# Altium PCB PCB.PcbDoc
Units mm, origin at the board's own origin, x right, y up, seen from the top; angles counter-clockwise.
Board outline 80.77 x 41.91 mm, 4 copper layers (SIG / PWR 1, GND, GND (Mid2), SIG / PWR 2), stack 0.603 mm thick; 49 components, 40 nets, 187 pads, 22 vias.
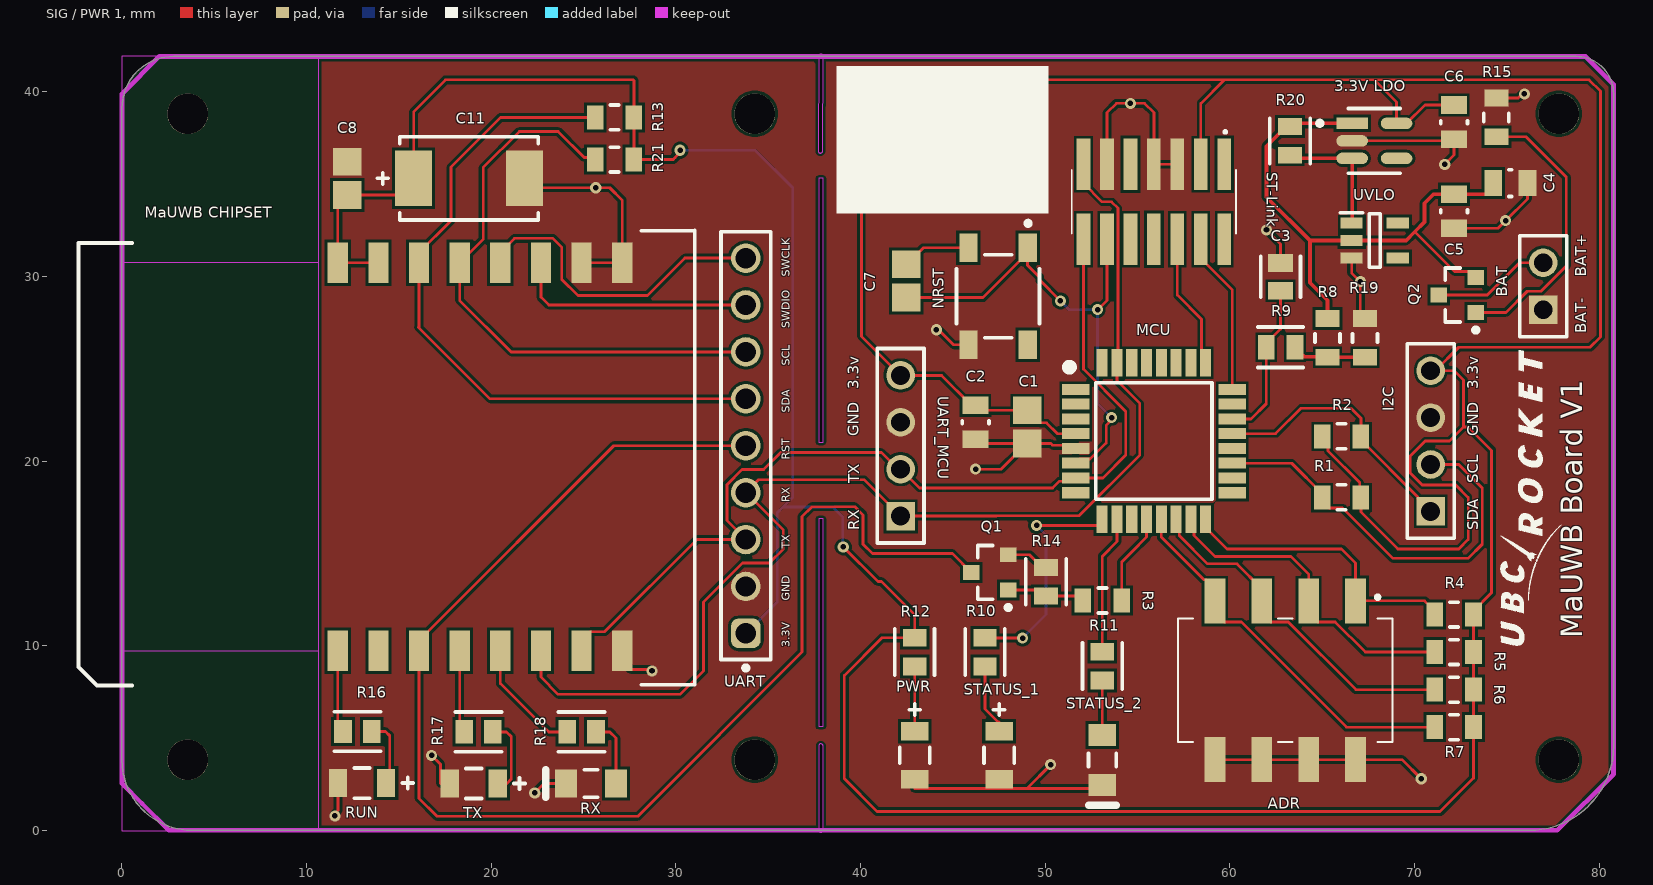
[diagram p0: SIG / PWR 1 view]
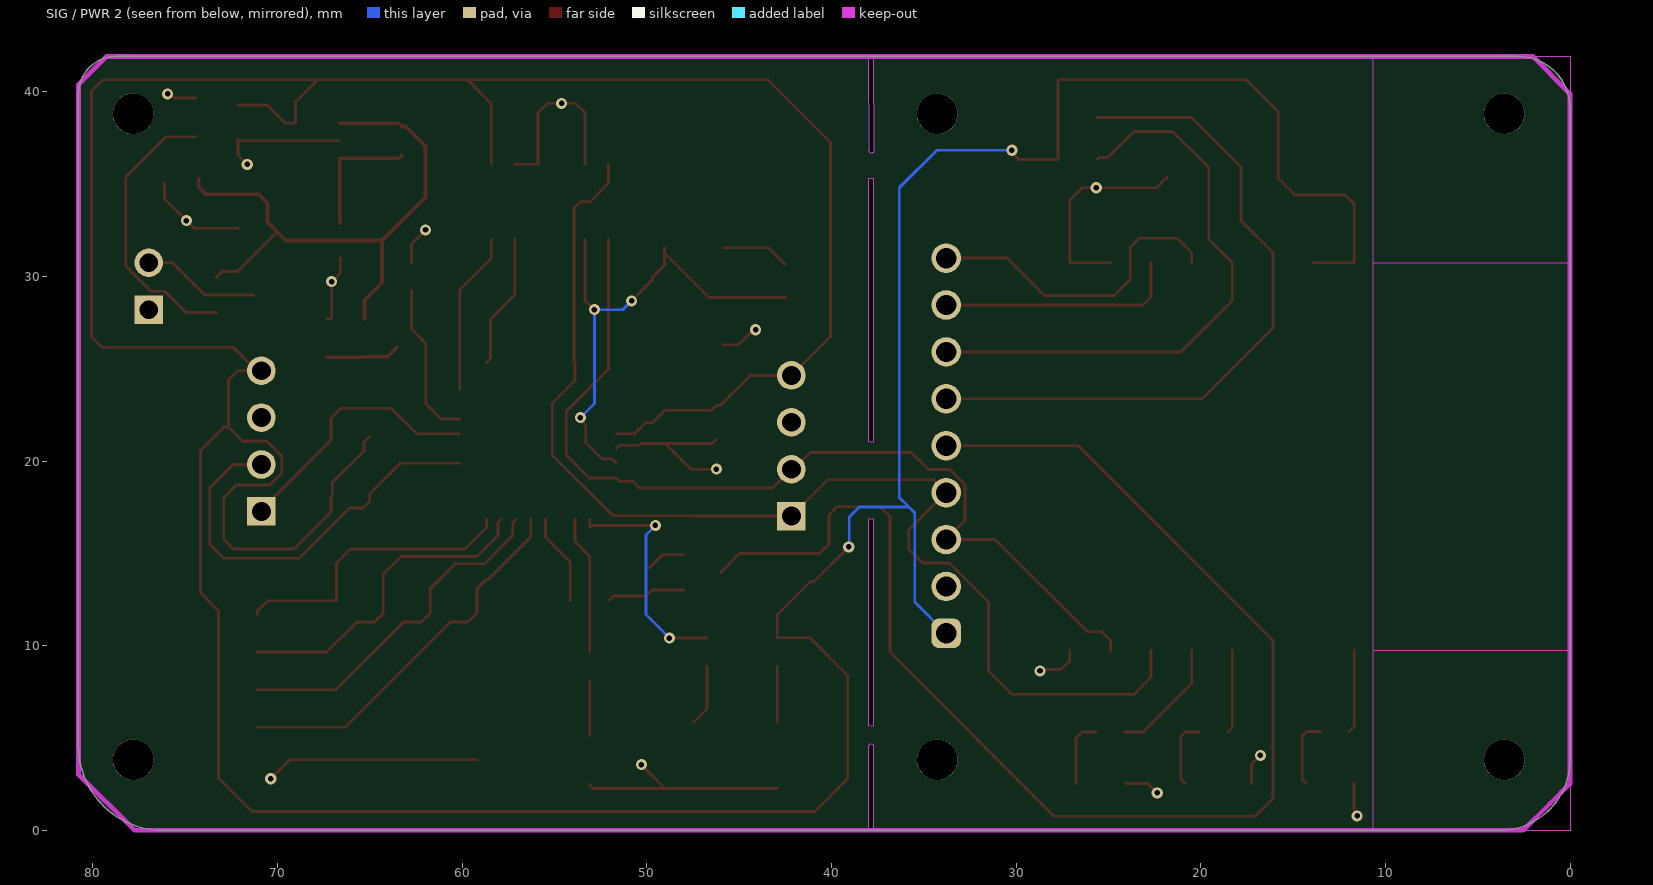
[diagram p1: SIG / PWR 2 view, seen from below]
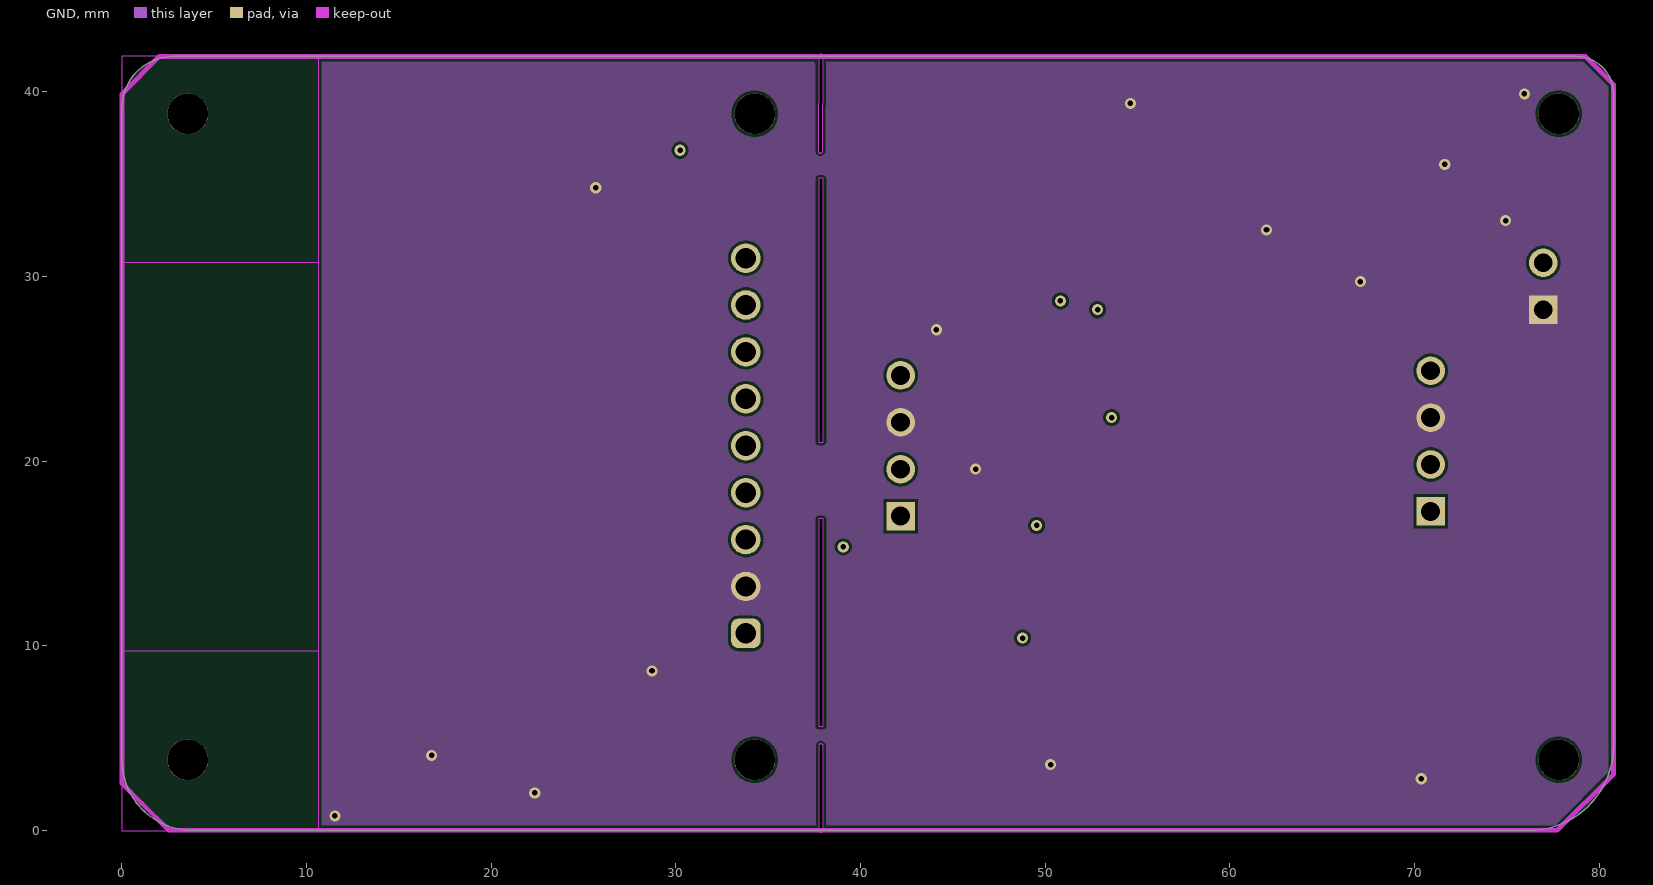
[diagram p2: GND]
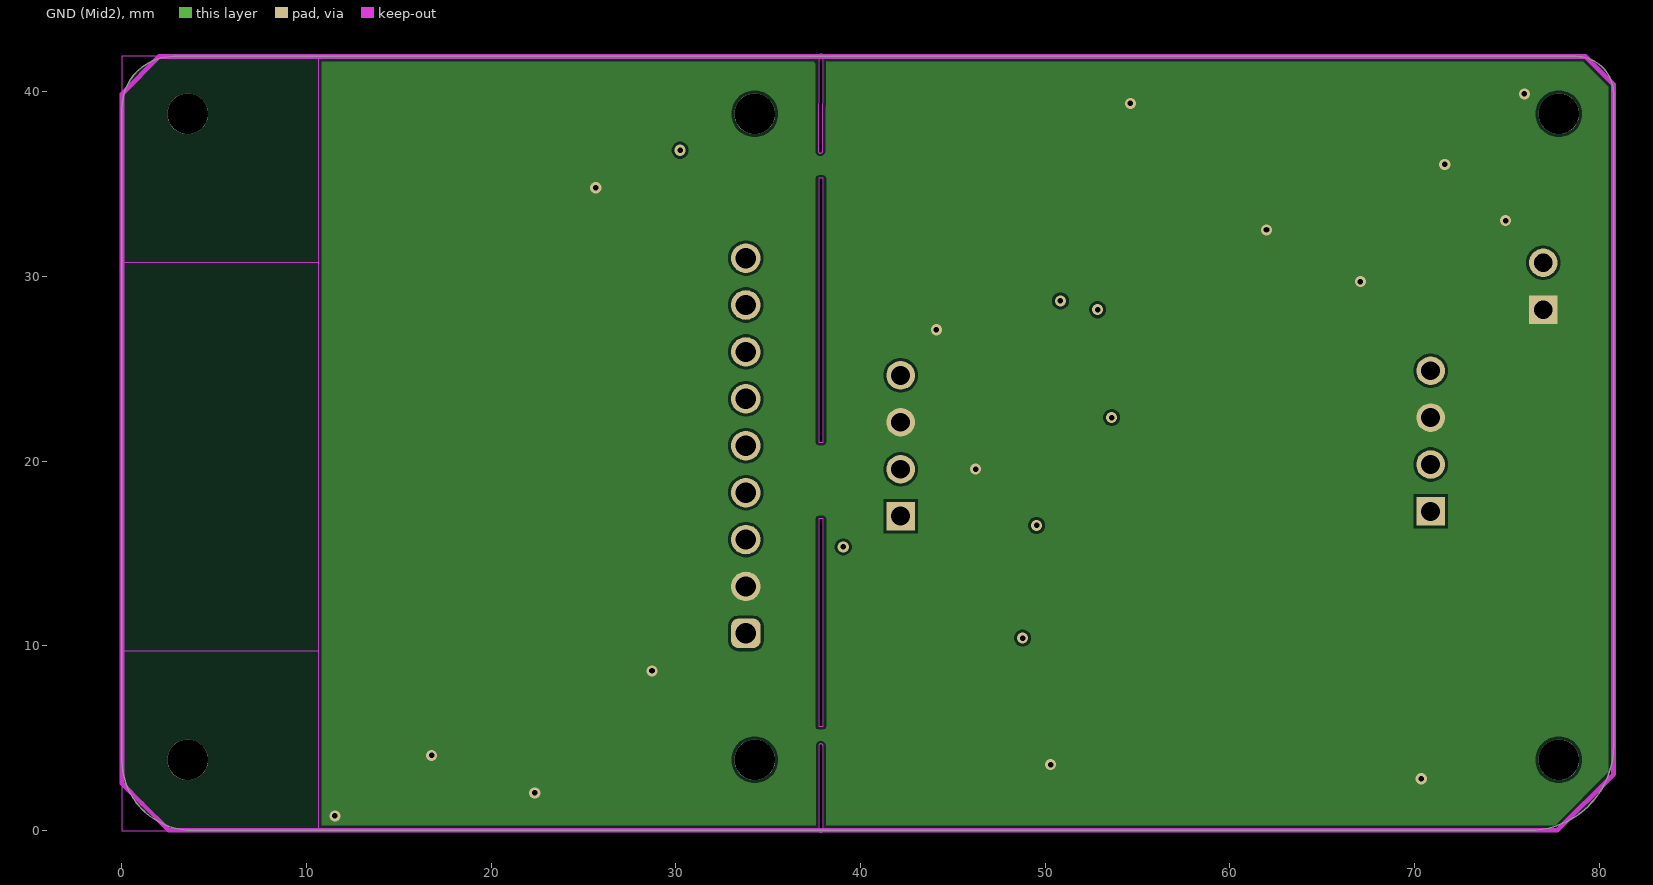
[diagram p3: GND (Mid2)]
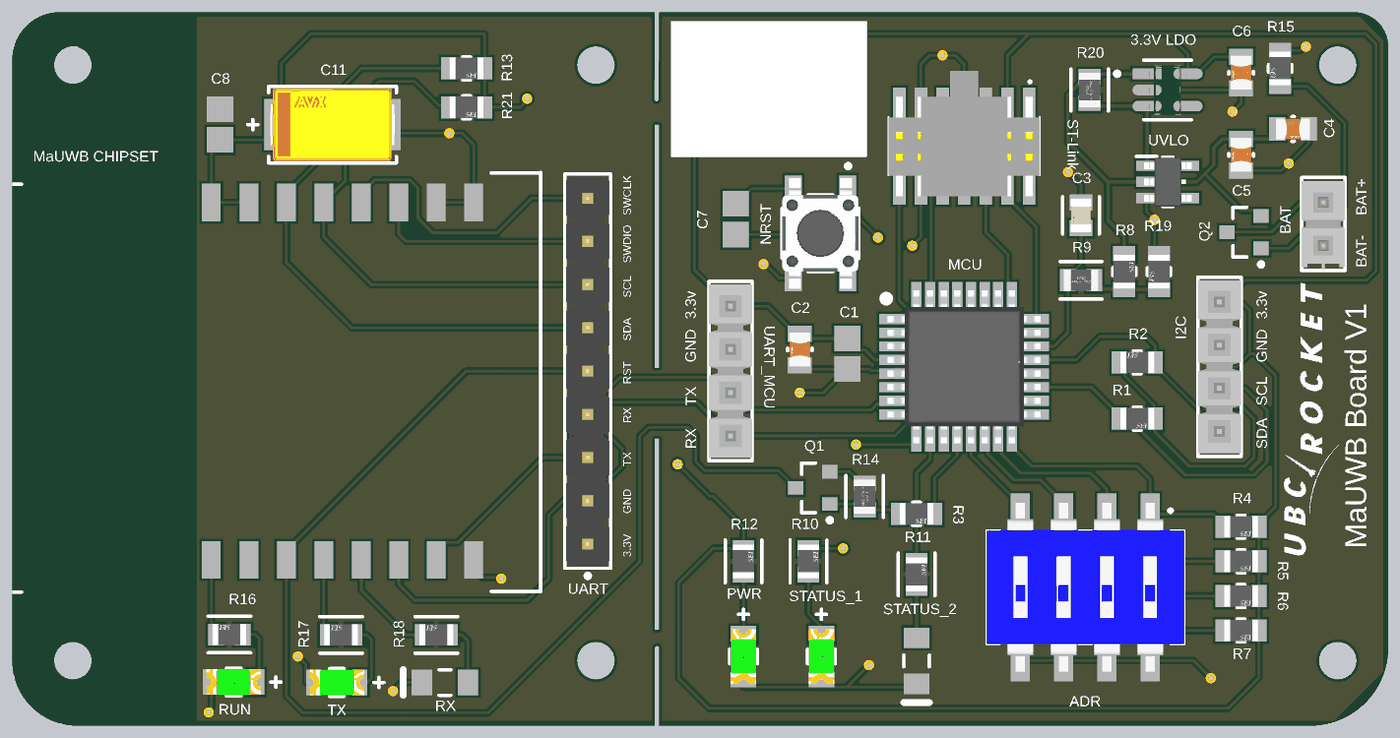
[diagram p4: 3D render of the assembled board from above, using the file's embedded part models]

## Layer stack, top to bottom
Top Solder: solder mask 0.0102, Solder Resist, Dk 3.5
SIG / PWR 1: signal copper 0.0356
Dielectric 2: prepreg 0.0711, PP-006, Dk 4.1
GND: signal copper 0.035
Dielectric 1: dielectric 0.32, FR-4, Dk 4.8
GND (Mid2): signal copper 0.035
Dielectric 3: prepreg 0.0711, PP-006, Dk 4.1
SIG / PWR 2: signal copper 0.0356
Bottom Solder: solder mask 0.0102, Solder Resist, Dk 3.5

## Board outline
3.81,0 76.2,0 ccw(c76.2,4.572) 80.772,4.572 80.772,39.878 ccw(c78.74,39.878) 78.74,41.91 2.794,41.91 ccw(c2.794,39.116) 0,39.116 0,3.81 ccw(c3.81,3.81)
cut-out: 37.693,36.801 ccw(c37.82,36.8) 37.947,36.799 37.973,41.909 37.973,41.91 ccw(c37.846,41.91) 37.719,41.911
cut-out: 37.719,21.02 37.973,21.02 37.973,35.31 37.719,35.31
cut-out: 37.719,0.02 ccw(c37.846,0.02) 37.973,0.02 37.973,4.56 ccw(c37.846,4.56) 37.719,4.56
cut-out: 37.719,5.63 37.973,5.63 37.973,16.87 37.719,16.87

## Design rules (kind name [scope] priority, off if disabled: settings)
Clearance [All] p1: gap=0.15 ignorepadtopadclearanceinfootprint=TRUE
ComponentClearance MCU [InComponent('MCU')] p1: gap=0 collisioncheckmode=3 verticalgap=0 showdistances=FALSE
ComponentClearance ComponentClearance_1 [All] p2: gap=0.254 collisioncheckmode=3 verticalgap=0.254 showdistances=FALSE
MinimumSolderMaskSliver [All] p1: minsoldermaskwidth=0.15
PlaneConnect [All] p1: planeconnectstyle=Direct reliefexpansion=0.508 reliefentries=4 reliefconductorwidth=0.254 reliefairgap=0.254
PolygonConnect [All] p1: connectstyle=Direct reliefconductorwidth=0.254 reliefentries=4 polygonreliefangle="90 Angle" airgapwidth=0.254
RoutingVias [All] p1: holewidth=0.3 width=0.6 viastyle="Through Hole" minholewidth=0.3 minwidth=0.6 maxholewidth=0.4 maxwidth=0.8
SilkToSilkClearance [All] p1: silktosilkclearance=0.15
SilkToSolderMaskClearance [IsPad] p1: minsilkscreentomaskgap=0.15 clearancetoexposedcopper=TRUE
SolderMaskExpansion [All] p1: expansion=0 istentingtop=FALSE
SupplyNets "Schematic Supply Nets" [InNet('GND')] p1: voltage=0.000
SupplyNets "Schematic Supply Nets_1" [InNet('3.3V')] p2: voltage=0.000
Width [All] p1: maxlimit=0.25 minlimit=0.15 preferedwidth=0.2
25 further rules are at their usual default settings.

## Classes and differential pairs
component class U_MCU: ADR C1 C2 C3 C7 I2C MCU NRST R1 R2 R4 R5 R6 R7 R8 R9 R10 R11 R19 ST-Link STATUS_1 STATUS_2 UART_MCU
component class U_MaUWB: C8 C11 "MaUWB CHIPSET" Q1 R3 R13 R14 R16 R17 R18 R21 RUN RX TX UART
component class U_BMS: "3.3V LDO" BAT C4 C5 C6 PWR Q2 R12 R15 R20 UVLO

## Components (designator, comment, footprint, x,y, rotation, side; value= is the part's Value field where it differs from the comment)
"3.3V LDO" "AP2112K-3.3TRG1" FP-SOT25-IPC_A 67.818,37.338 r0 top
ADR "219-4MST" 2194MST 62.992,8.128 r180 top
BAT "TSW-102-26-G-S" SMTC-TSW-102-26-XX-S 76.962,28.194 r90 top
C1 "100nF, 0805, X5R, 10%" CAPC2013X140X50ML20T25 49.022,21.844 r90 top
C2 "1uF, 0805, X7R, 10%" FP-CC0805-0_85-MFG 46.228,22.098 r270 top value="1 uF"
C3 "10pF, 0805, X7R, 5%" FP-C0805C-DN-MFG 62.738,29.972 r90 top value="10 pF"
C4 "1uF, X7R, 0805, 10%" FP-CC0805-0_85-MFG 75.184,35.052 r0 top value="1 uF"
C5 "1uF, X7R, 0805, 10%" FP-CC0805-0_85-MFG 72.136,33.528 r270 top value="1 uF"
C6 "1uF, X7R, 0805, 10%" FP-CC0805-0_85-MFG 72.136,38.354 r270 top value="1 uF"
C7 "100nF, 0805, X5R, 10%" CAPC2013X140X50ML20T25 42.47,29.75 r270 top
C8 "100nF, 0805, X5R, 10%" CAPC2013X140X50ML20T25 12.192,35.306 r270 top
C11 "100uF, Tantalum, 2917, 10V" FP-TAJD-MFG 18.796,35.306 r180 top
I2C "TSW-104-08-G-S" SMTC-TSW-104-08-X-S 70.866,17.272 r90 top
"MaUWB CHIPSET" "MaUWB_DW3000" MaUWB_DW3000 0.088,9.734 r90 top
MCU "STM32C031K4T6" QFP80P900X900X160-32N 55.88,21.082 r0 top
NRST "TACT SW, 50mA" FP-PTS647SK38SMTR2LFS-MFG 47.44,28.92 r270 top
PWR "LED Green, 1206, 20mA" FP-SML-LX1206GC-TR-MFG 42.926,4.064 r270 top
Q1 "NPN, 200mA, SOT-23" ONSC-SOT-23-3-318-08_V 46.99,13.97 r180 top
Q2 "PMOS, 3.7A, SOT-23" ONSC-SOT-23-3-318-08_V 72.31,28.99 r180 top
R1 "" FP-RMCF0805-MFG 66.04,18.034 r0 top
R2 "" FP-RMCF0805-MFG 66.04,21.336 r180 top
R3 "4.7k, 0805, 5%" FP-RMCF0805-MFG 53.086,12.446 r0 top
R4 "" FP-RMCF0805-MFG 72.136,11.684 r0 top
R5 "" FP-RMCF0805-MFG 72.136,9.652 r0 top
R6 "" FP-RMCF0805-MFG 72.136,7.62 r0 top
R7 "4.7k, 0805, 5%" FP-RMCF0805-MFG 72.136,5.588 r0 top
R8 "4.7k, 0805, 5%" FP-RMCF0805-MFG 65.278,26.67 r90 top
R9 "100k, 0805, 1%" FP-CRGCQ0805-IPC_C 62.738,26.162 r0 top value=100KΩ
R10 "470, 0805, 1%" FP-RMCF0805-IPC_C 46.736,9.652 r90 top
R11 "470, 0805, 1%" FP-RMCF0805-IPC_C 53.086,8.89 r90 top
R12 "470, 0805, 1%" FP-RMCF0805-IPC_C 42.926,9.652 r90 top
R13 "" FP-RMCF0805-MFG 26.67,38.608 r0 top
R14 "47k, 0805, 5%" FP-CRGCQ0805-IPC_C 50.038,13.462 r270 top value=47KΩ
R15 "4.7k, 0805, 5%" FP-RMCF0805-MFG 74.422,38.608 r270 top
R16 "" FP-RMCF0805-IPC_C 12.744,5.354 r180 top
R17 "" FP-RMCF0805-IPC_C 19.304,5.334 r180 top
R18 "470, 0805, 1%" FP-RMCF0805-IPC_C 24.892,5.334 r180 top
R19 "4.7k, 0805, 5%" FP-RMCF0805-MFG 67.31,26.67 r270 top
R20 "100k, 0805, 1%" FP-CRGCQ0805-IPC_C 63.246,37.338 r90 top value=100KΩ
R21 "4.7k, 0805, 5%" FP-RMCF0805-MFG 26.67,36.322 r0 top
RUN "LED Green, 1206, 20mA" FP-SML-LX1206GC-TR-MFG 12.998,2.56 r180 top
RX "LED Red, 1206, 30mA" LUMX-SML-LX1206IC_V 25.4,2.54 r180 top
ST-Link "FTSH-107-01-F-DV-K-P-TR" FTSH-107-XX-YYY-DV-K-P-TR 55.88,34.036 r180 top
STATUS_1 "LED Green, 1206, 20mA" FP-SML-LX1206GC-TR-MFG 47.498,4.064 r270 top
STATUS_2 "LED Red, 1206, 30mA" LUMX-SML-LX1206IC_V 53.086,3.81 r270 top
TX "" FP-SML-LX1206GC-TR-MFG 19.05,2.54 r180 top
UART "61300911121" 61300911121 33.782,20.828 r90 top
UART_MCU "TSW-104-08-G-S" SMTC-TSW-104-08-X-S 42.164,17.018 r90 top
UVLO "TLV840NADL35DBVR" SOT95P280X145-5N 67.838,31.938 r0 top

## Footprints (in the part's own frame and the unit in brackets; to place one, negate y for a bottom-side part, rotate by r counter-clockwise, add the part's x,y. Pads: shape width x height; smd on the part's side, far side on the other; paste and mask are expansions set on the pad)
2194MST [mm]
  rect 1.13x2.44 smd: 1(-3.81,-4.3) 2(-1.27,-4.3) 3(1.27,-4.3) 4(3.81,-4.3) 5(3.81,4.3) 6(1.27,4.3) 7(-1.27,4.3) 8(-3.81,4.3)
  silkscreen extent -5.81,-4.6 5.81,3.35, body extent -5.81,-4.95 5.81,4.95, height 4.27
61300911121 [mm] "Pin Header, pitch 2.54 mm, THT, Vertical, single row, 9p"
  rrect50% 1.6x1.6 hole 1.1: 1(-10.16,0)
  round 1.6 hole 1.1: 2(-7.62,0) 3(-5.08,0) 4(-2.54,0) 5(0,0) 6(2.54,0) 7(5.08,0) 8(7.62,0) 9(10.16,0)
  silkscreen extent -12.15,-1.35 11.58,1.35, body extent -11.43,-1.27 11.43,1.27, height 8.57
CAPC2013X140X50ML20T25 [mm] "Chip Capacitor, 2-Leads, Body 2.00x1.25mm, IPC Low Density"
  rect 1.5x1.55 smd: 1(-0.9,0) 2(0.9,0)
  body extent -1.1,-0.72 1.1,0.72, height 1.4
FP-C0805C-DN-MFG [mm]
  rect 0.95x1.35 smd paste+0 mask+0: 1(-0.75,0) 2(0.75,0)
  silkscreen extent -1.1,-1.07 1.1,1.07, body extent -1.4,-0.85 1.4,0.85, height 0.25
FP-CC0805-0_85-MFG [mm]
  rect 0.95x1.4 smd paste+0 mask+0: 1(-0.925,0) 2(0.925,0)
  silkscreen extent -0.08,-0.72 0.08,0.72, body extent -1.6,-1.05 1.6,1.05, height 0.25
FP-CRGCQ0805-IPC_C [mm]
  rect 0.906x1.31 smd paste+0 mask+0: 1(-0.776,0) 2(0.776,0)
  silkscreen extent -1.23,-1.1 1.23,1.1, body extent -1.33,-0.8 1.33,0.8, height 0.25
FP-PTS647SK38SMTR2LFS-MFG [mm]
  rect 1.55x1 smd paste+0 mask+0: 1(-2.625,1.6) 2(2.625,1.6) 3(-2.625,-1.6) 4(2.625,-1.6)
  silkscreen extent -4.07,-2.25 2.25,2.25, body extent -3.5,-2.35 3.5,2.35, height 0.25
FP-RMCF0805-IPC_C [mm]
  rect 0.955x1.262 smd paste+0 mask+0: 1(-0.776,0) 2(0.776,0)
  silkscreen extent -1.25,-1.07 1.25,1.07, body extent -1.35,-0.77 1.35,0.77, height 0.25
FP-RMCF0805-MFG [mm]
  rect 0.9x1.3 smd paste+0 mask+0: 1(-1.05,0) 2(1.05,0)
  silkscreen extent -0.23,-0.67 0.23,0.67, body extent -1.6,-0.77 1.6,0.77, height 0.25
FP-SML-LX1206GC-TR-MFG [mm]
  rect 1x1.5 smd paste+0 mask+0: 1(-1.3,0) 2(1.3,0)
  silkscreen extent -2.78,-0.81 0.43,0.81, body extent -1.9,-0.91 1.9,0.91, height 0.25
FP-SOT25-IPC_A [mm]
  rect 1.707x0.616 smd paste+0 mask+0: 1(-1.201,0.95)
  rrect100% 1.707x0.616 smd paste+0 mask+0: 2(-1.201,0) 3(-1.201,-0.95) 4(1.201,-0.95) 5(1.201,0.95)
  silkscreen extent -3.08,-1.75 1.4,1.75, body extent -2.55,-2 2.55,2, height 0.25
FP-TAJD-MFG [mm]
  rect 2x3 smd paste+0 mask+0: 1(-3,0) 2(3,0)
  silkscreen extent -3.75,-2.25 4.97,2.25, body extent -4.1,-2.35 4.1,2.35, height 0.25
FTSH-107-XX-YYY-DV-K-P-TR [mm]
  rect 0.74x2.79 smd: 1(-3.81,-2.035) 2(-3.81,2.035) 3(-2.54,-2.035) 4(-2.54,2.035) 5(-1.27,-2.035) 6(-1.27,2.035) 7(0,-2.035) 8(0,2.035) 9(1.27,-2.035) 10(1.27,2.035) 11(2.54,-2.035) 12(2.54,2.035) 13(3.81,-2.035) 14(3.81,2.035)
  silkscreen extent -4.44,-3.83 4.44,1.72, body extent -4.44,-4.43 4.45,2.94, height 6.99
LUMX-SML-LX1206IC_V [mm] "SMD, 2-Leads, Body 3.2x1.5mm"
  rect 1.2x1.5 smd: 1(-1.35,0) 2(1.35,0)
  silkscreen extent -0.35,-0.75 2.45,0.75, body extent -1.6,-0.8 1.6,0.8, height 1.1
MaUWB_DW3000 [mm]
  rect 2.2x1.1 smd: 1(0,-11.6) 2(0,-13.8) 3(0,-16) 4(0,-18.2) 5(0,-20.4) 6(0,-22.6) 7(0,-24.8) 8(0,-27) 9(21,-11.6) 10(21,-13.8) 11(21,-16) 12(21,-18.2) 13(21,-20.4) 14(21,-22.6) 15(21,-24.8) 16(21,-27)
  Keep-Out Layer region: 0,-10.58 21,-10.58 21,0 0,0
  silkscreen extent -1.89,-30.93 22.76,2.45
ONSC-SOT-23-3-318-08_V [mm] "SOT23, 3-Leads, Body 2.92x1.3mm, Pitch 0.95mm"
  rect 0.9x0.8 smd: 1(-1,0.95) 2(-1,-0.95) 3(1,0)
  silkscreen extent -1.13,-1.46 0.65,2.02, body extent -0.65,-1.46 0.65,1.46, height 1.11
QFP80P900X900X160-32N [mm]
  rect 1.475x0.6 smd: 1(-4.238,2.8) 2(-4.238,2) 3(-4.238,1.2) 4(-4.238,0.4) 5(-4.238,-0.4) 6(-4.238,-1.2) 7(-4.238,-2) 8(-4.238,-2.8) 17(4.238,-2.8) 18(4.238,-2) 19(4.238,-1.2) 20(4.238,-0.4) 21(4.238,0.4) 22(4.238,1.2) 23(4.238,2) 24(4.238,2.8)
  rect 0.6x1.475 smd: 9(-2.8,-4.238) 10(-2,-4.238) 11(-1.2,-4.238) 12(-0.4,-4.238) 13(0.4,-4.238) 14(1.2,-4.238) 15(2,-4.238) 16(2.8,-4.238) 25(2.8,4.238) 26(2,4.238) 27(1.2,4.238) 28(0.4,4.238) 29(-0.4,4.238) 30(-1.2,4.238) 31(-2,4.238) 32(-2.8,4.238)
  silkscreen extent -4.77,-3.15 3.15,4.2, body extent -4.5,-4.5 4.5,4.5, height 1.6
SMTC-TSW-102-26-XX-S [mm] ".025 SQ Post Terminal Strip Assembly, 1x2 Pins, Vertical, 2.54mm Pitch, Male"
  rect 1.55x1.55 hole 1.02: 1(0,0)
  round 1.55 hole 1.02: 2(2.54,0)
  silkscreen extent -1.46,-1.27 4,1.27, body extent -1.4,-1.27 3.81,1.27, height 8.38
SMTC-TSW-104-08-X-S [mm] ".025 SQ Post Terminal Strip Assembly, 1x4 Pins, Vertical, 2.54mm Pitch, Male"
  rect 1.55x1.55 hole 1.02: 1(0,0)
  round 1.55 hole 1.02: 2(2.54,0) 3(5.08,0) 4(7.62,0)
  silkscreen extent -1.46,-1.27 9.08,1.27, body extent -1.27,-1.27 8.89,1.27, height 8.38
SOT95P280X145-5N [mm]
  rect 1.2x0.6 smd: 1(-1.25,0.95) 2(-1.25,0) 3(-1.25,-0.95) 4(1.25,-0.95) 5(1.25,0.95)
  silkscreen extent -1.85,-1.45 0.3,1.5, body extent -1.4,-1.45 1.4,1.45, height 1.2

## Part data
"3.3V LDO": library part CMP-12756-000035-1, "IC REG LINEAR 3.3V 600MA SOT25", Case/Package=SOT-23-5, Dropout Voltage=250mV, Max Input Voltage=6V, Max Operating Temperature=85°C, Max Output Current=600mA, Min Input Voltage=2.5V, Min Operating Temperature=-40°C, Output Voltage=3.3V, Package Quantity=1, Quiescent Current=55uA, Accuracy=1.5%, Height=1.3mm, Lead Free="Lead Free", Length=3.1mm, Mount="Surface Mount", Number of Outputs=1, Number of Pins=5, Number of Regulators=1, Output Current=600mA, Output Type=Fixed, Packaging="Tape and Reel", Polarity=Positive, Width=1.7mm
ADR: "Switch", Manufacturer_Name=CTS, Mouser Part Number=774-2194MST, Arrow Part Number=219-4MST, Arrow Price/Stock=https://www.arrow.com/en/products/219-4mst/cts, Datasheet Link=https://componentsearchengine.com/Datasheets/1/219-4MST.pdf, Height=4.3mm, Manufacturer_Part_Number=219-4MST, Mouser Price/Stock=https://www.mouser.co.uk/ProductDetail/CTS-Electronic-Components/219-4MST?qs=qNzHFtQhdJ8xGV2Z9mul9A%3D%3D
BAT: library part CMP-1024-00327-1, "0.025\" SQ Post Header, Through-hole, Vertical, -55 to 125 degC, 2.54 mm Pitch, 2-Pin, Male, RoHS", Manufacturer=Samtec, Temperature Range="-55 to 125 degC", ComponentLink1Description="Manufacturer URL", ComponentLink1URL=http://www.samtec.com, ComponentLink2Description=Datasheet, ComponentLink2URL=http://www.samtec.com/documents/webfiles/pdf/TSW_TH.PDF, ComponentLink3Description="Package Specification", ComponentLink3URL=http://www.samtec.com/documents/webfiles/cpdf/TSW-XXX-XX-XXX-X-XX-XXX-MKT.pdf, DatasheetVersion=F-214, Mounting Technology=Through-hole, Orientation=Vertical, PackageDescription=".025[0.64] SQ. Post Terminal Strip Assembly", PackageReference=TSW-102-26-XX-S, PackageVersion="DM, 8/1988", PartNumber=TSW-102-26-G-S, Pitch="2.54 mm", RoHS=True
C1 C7 C8: library part CMP-2007-04689-1, Manufacturer="AVX Interconnect / Elco", Part Number=08055D104KAT2A
C2 C4 C5 C6: library part CMP-03422-001015-1, "CC0805 1 uF X7R 10.00% 50 V", Capacitance="1 uF", Manufacturer=Yageo, Manufacturer Part Number=CC0805KFX7R9BB105, Package=CC0805-0.85, Temperature="-30°C to +85°C", Temperature Characteristic=X7R, Temperature Range High=+85°C, Temperature Range Low=-30°C, Tolerance=0.1, Voltage Rating="50 V", Automotive=No, Category=Cap, ComponentLink2Description=Datasheet, ComponentLink2URL=http://www.yageo.com/documents/recent/UPY-GPHC_Y5V_6.3V-to-50V_8.pdf, Device Class L1="Passive Components", Device Class L2=Capacitors, Device Class L3="Ceramic Capacitors", Footprint Url=http://www.yageo.com/exep/pages/download/literatures/UPY-C_GEN_24.pdf, Height=0.95mm, Ipc Land Pattern Name=CAPC200125X85, Lead Free=Yes, Material=Ceramic, Mouser Description="Cap Ceramic 1uF 50VDC X7R 10% SMD 0805 125°C BP", Octopart=https://octopart.com/cc0805kfx7r9bb105-yageo-76378930, RoHS=TRUE
C3: library part CMP-03020-021676-1, "C0805 10 pF X7R 30ppm/°C 5.00% 50 V", Capacitance="10 pF", Manufacturer=KEMET, Manufacturer Part Number=C0805C100J5RACTU, Package=C0805C-DN, Temperature="-55°C to +125°C", Temperature Characteristic=X7R, Temperature Coefficient=30ppm/°C, Temperature Range High=+125°C, Temperature Range Low=-55°C, Tolerance=0.05, Voltage Rating="50 V", Automotive=No, Category=Cap, ComponentLink2Description=Datasheet, ComponentLink2URL=https://content.kemet.com/datasheets/KEM_C1003_C0G_SMD.pdf, Device Class L1="Passive Components", Device Class L2=Capacitors, Device Class L3="Ceramic Capacitors", Height=0.88mm, Ipc Land Pattern Name=CAPC200125X78, Lead Free=Yes, Material=Ceramic, Mouser Description="Cap, 10PF, 50V, Mlcc, 0805", Octopart=https://octopart.com/c0805c100j5ractu-kemet-81794931, RoHS=TRUE
C11: library part CMP-04424-000500-1, "100uF 10V  ±10% 900mΩ 2917  SMD Tantalum Capacitor", Capacitance=100uF, Case Code (Imperial)=2917, Case Code (Metric)=7343, Dielectric Material=Tantalum, ESR (Equivalent Series Resistance)=700mR, Leakage Current=10uA, Max Operating Temperature=125°C, Min Operating Temperature=-55°C, Package Quantity=1, Tolerance=10%, Voltage=10V, Case/Package=2917, Construction=Flat, Depth=4.3mm, Dissipation Factor=6%, Features="General Purpose", Height=2.9mm, Height - Seated (Max)=0.122inch, Lead Free="Lead Free", Length=7.3mm, Mount="Surface Mount", Packaging="Tape and Reel", Polarity=Polar, Q Factor=6, Radiation Hardening=No, REACH SVHC="No SVHC", RoHS Compliant=Yes, Series=TAJ, Termination=SMD/SMT, Voltage Rating=10V, Voltage Rating (DC)=10V, Width=4.3mm
I2C UART_MCU: library part CMP-1024-00357-1, "0.025\" SQ Post Header, Through-hole, Vertical, -55 to 125 degC, 2.54 mm Pitch, 4-Pin, Male, RoHS", Manufacturer=Samtec, Temperature Range="-55 to 125 degC", ComponentLink1Description="Manufacturer URL", ComponentLink1URL=http://www.samtec.com, ComponentLink2Description=Datasheet, ComponentLink2URL=http://www.samtec.com/documents/webfiles/pdf/TSW_TH.PDF, ComponentLink3Description="Package Specification", ComponentLink3URL=http://www.samtec.com/documents/webfiles/cpdf/TSW-XXX-XX-XXX-X-XX-XXX-MKT.pdf, DatasheetVersion=F-214, Mounting Technology=Through-hole, Orientation=Vertical, PackageDescription=".025[0.64] SQ. Post Terminal Strip Assembly", PackageReference=TSW-104-08-X-S, PackageVersion="DM, 8/1988", PartNumber=TSW-104-08-G-S, Pitch="2.54 mm", RoHS=True
MCU: "Integrated Circuit", Manufacturer_Name=STMicroelectronics, Mouser Part Number=511-STM32C031K4T6, Arrow Part Number=STM32C031K4T6, Arrow Price/Stock=https://www.arrow.com/en/products/stm32c031k4t6/stmicroelectronics?region=nac, Datasheet Link=https://www.st.com/resource/en/datasheet/stm32c031c4.pdf, Height=1.6mm, Manufacturer_Part_Number=STM32C031K4T6, Mouser Price/Stock=https://www.mouser.co.uk/ProductDetail/STMicroelectronics/STM32C031K4T6?qs=IPgv5n7u5QbiXsG7yxbPWw%3D%3D
NRST: library part CMP-10040-000033-1, "TACT 4.5 X 4.5, 3.8 MM H, 2.5N,", Max Operating Temperature=70°C, Min Operating Temperature=-20°C, Operating Force=250gf, Ratings=IP40, Actuator Type=Standard, Illumination Type=Non-Illuminated, Mechanical Life=100000Cycles, Mount="Surface Mount", Packaging="Tape and Reel", Switch Function=Off-Mom, Switch Travel=0.25mm, Termination="Gull Wing", Throw Configuration=SPST
PWR RUN STATUS_1 TX: library part CMP-2000-07122-2, "LED GREEN CLEAR 1206 SMD", Case Code (Imperial)=1206, Case Code (Metric)=3216, Color=Green, Current Rating=25mA, Forward Current=20mA, Forward Voltage=2.2V, Lens Color=Colorless, Max Operating Temperature=85°C, Min Operating Temperature=-40°C, Package Quantity=1, Power Rating=65mW, Approvals=UL, Case/Package=1206, Dominant Wavelength=565nm, Height=1.1mm, Illumination Color=Green, Lead Free="Lead Free", Length=3.2mm, Lens Style=Rectangular, Lens Transparency=Clear, Luminous Intensity=10mcd, Mount="Surface Mount", Number of LEDs=1, Number of Pins=2, Packaging="Tape and Reel", REACH SVHC="No SVHC", RoHS Compliant=Yes, Test Current=20mA, Viewing Angle=160°, Wavelength=565nm, Width=1.6mm
Q1: library part CMP-1048-00631-1, "General Purpose Transistor, NPN Silicon, 3-Pin SOT-23, Pb-Free, Tape and Reel", Manufacturer="On Semiconductor", PartNumber=MMBT3904LT1G, ComponentLink1Description="Manufacturer URL", ComponentLink1URL=http://www.onsemi.com/, ComponentLink2Description=Datasheet, ComponentLink2URL=http://www.onsemi.cn/pub_link/Collateral/MMBT3904LT1-D.PDF, ComponentLink3Description="Package Specification", ComponentLink3URL=http://www.onsemi.cn/pub_link/Collateral/318-08.PDF, DatasheetVersion="Rev. 12", fT Min (MHz)=300, IC Continuous (A)=0.2, Mounting Technology="Surface Mount", PackageDescription="3-Pin Small Outline Transistor, Body 2.92 x 1.3 mm, Pitch 0.95 mm", PackageReference=SOT-23-3-318-08, PackageVersion="Rev. AP, 11/2009", Packing="Tape and Reel", Polarity=NPN, RoHS=TRUE
Q2: library part CMP-1058-00758-1, "Small Signal MOSFET, -8 V, -3.7 A, Single P-Channel, 3-Pin SOT-23, Pb-Free, Tape and Reel", Manufacturer="On Semiconductor", Package Type=SOT-23-3, PartNumber=NTR2101PT1G, Channel Polarity="P Channel", Ciss Typ (pF)=1173, ComponentLink1Description="Manufacturer URL", ComponentLink1URL=http://www.onsemi.com/, ComponentLink2Description=Datasheet, ComponentLink2URL=http://www.onsemi.cn/pub_link/Collateral/NTR2101P-D.PDF, ComponentLink3Description="Package Specification", ComponentLink3URL=http://www.onsemi.cn/pub_link/Collateral/318-08.PDF, Configuration=Single, Coss Typ (pF)=289, Crss Typ (pF)=218, DatasheetVersion="Rev. 6", ID Max (A)=3.7, Mounting Technology="Surface Mount", PackageDescription="3-Pin Small Outline Transistor, Body 2.92 x 1.3 mm, Pitch 0.95 mm", PackageReference=SOT-23-3-318-08, PackageVersion="Rev. AP, 11/2009", Packing="Tape and Reel", PD Max (W)=0.96, RoHS=Pb-Free, V(BR)DSS Min (V)=8, VGS Max (V)=8, VGS(th) Max (V)=1
R1 R2 R3 R4 R5 R6 R7 R8 R13 R15 R19 R21: library part CMP-26527-004085-1, "4.7kΩ ±5% 0.125W 0805 Thick Film Chip Resistor AEC-Q200 compliant", Case Code (Imperial)=0805, Case Code (Metric)=2012, Max Operating Temperature=155°C, Max Power Dissipation=125mW, Min Operating Temperature=-55°C, Package Quantity=10000, Resistance=4.7kR, Resistor Type="Thick Film", Temperature Coefficient=200ppm/°C, Tolerance=5%, Case/Package=0805, Contact Plating=Tin, Features="Automotive AEC-Q200", Height=0.026inch, Length=0.079inch, Mount="Surface Mount", Number of Terminations=2, Packaging="Tape and Reel", Radiation Hardening=No, RoHS Compliant=Yes, Series=RMCF, Width=0.049inch
R9 R20: library part CMP-03211-000816-1, "CRGCQ 0805 100K 1%", Ambient Temperature Range High=+70°C, Manufacturer="TE Connectivity", Manufacturer Part Number=CRGCQ0805F100K, Package=CRGCQ0805, Power Rating=0.125W, Resistance=100KΩ, Temperature="-55°C to +155°C", Temperature Coefficient=±100ppm/°C, Temperature Range High=+155°C, Temperature Range Low=-55°C, Tolerance=0.01, Voltage Rating=150V, Automotive=Yes, Automotive Grade="Grade 1141", Category=Res, ComponentLink2Description=Datasheet, ComponentLink2URL=https://www.te.com/commerce/DocumentDelivery/DDEController?Action=showdoc&DocId=Data+Sheet%7F1773204-3%7F1%7Fpdf%7FEnglish%7FENG_DS_1773204-3_1.pdf%7F4-2176341-1150, Composition="Thick Film", Device Class L1="Passive Components", Device Class L2=Resistors, Device Class L3="Chip SMD Resistors", Digikey Description="CRGCQ 0805 100K 1%", Height=0.65mm, Ipc Land Pattern Name=RESC200125X55, Lead Free=Yes, Mouser Description="Res Thick Film 0805 100K Ohm 1% 0.125W(1/8W) ±100ppm/C Pad SMD Automotive T/R", Octopart=https://octopart.com/crgcq0805f100k-te+connectivity-91018138, RoHS=TRUE, Series=CRGCQ
R10 R11 R12 R16 R17 R18: library part CMP-26527-003746-1, "470Ω ±1% 0.125W 0805 Thick Film Chip Resistor AEC-Q200 compliant", Case/Package=0805, Max Operating Temperature=155°C, Max Power Dissipation=125mW, Min Operating Temperature=-55°C, Resistance=470R, Resistor Type="Thick Film", Temperature Coefficient=100ppm/°C, Tolerance=1%, Contact Plating=Tin, Features="Automotive AEC-Q200", Mount="Surface Mount", Number of Terminations=2, Packaging="Tape and Reel", Radiation Hardening=No, RoHS Compliant=Yes, Series=RMCF
R14: library part CMP-03211-001080-1, "CRGCQ0805 47KΩ 0.125W ±100ppm/°C 5% 150V", Ambient Temperature Range High=+70°C, Manufacturer="TE Connectivity", Manufacturer Part Number=CRGCQ0805J47K, Package=CRGCQ0805, Power Rating=0.125W, Resistance=47KΩ, Temperature="-55°C to +155°C", Temperature Coefficient=±100ppm/°C, Temperature Range High=+155°C, Temperature Range Low=-55°C, Tolerance=0.05, Voltage Rating=150V, Automotive=Yes, Automotive Grade="Grade 1066", Category=Res, ComponentLink2Description=Datasheet, ComponentLink2URL=https://www.te.com/commerce/DocumentDelivery/DDEController?Action=showdoc&DocId=Data+Sheet%7F1773204-3%7F1%7Fpdf%7FEnglish%7FENG_DS_1773204-3_1.pdf%7F4-2176341-1075, Composition="Thick Film", Device Class L1="Passive Components", Device Class L2=Resistors, Device Class L3="Chip SMD Resistors", Height=0.65mm, Ipc Land Pattern Name=RESC200125X55, Lead Free=Yes, Octopart=https://octopart.com/crgcq0805j47k-te+connectivity-91018230, RoHS=TRUE, Series=CRGCQ
RX STATUS_2: library part CMP-2000-07123-1, "LED Red, 65 mW, -40 to 85 degC, 2-Pin SMD, RoHS, Tape and Reel", Color=Red, Manufacturer=Lumex, Operating Temperature=-25to85C, Package Description="2-Pin Surface Mount Device, Body 3.2 x 1.5 mm", Package Reference=SML-LX1206IC, Part No=SML-LX1206IC-TR, Reverse Voltage=5(Min)V, Supplier_Package=SMD, Datasheet URL=http://www.lumex.com/content/files/ProductAttachment/SML-LX1206IC-TR.pdf, Datasheet Version="Rev. J, 08/2012", Dimension=3.2x1.6x1.1mm, Dominant Wavelength=N/A, ECCN=EAR99, Family=SML-LX1206IC, HTS=8541402000, Intensity=6mcd, LED Material=GaAsP, Lens Appearance=ColorlessNonDiffused, Lens Dimensions=2x1.6x0.5mm, Manufacturer URL=http://www.lumexinstruments.com/, Mounting=SurfaceMount, Mounting Technology=SurfaceMount, Number of LEDs=1, Packaging=TapeandReel, Peak Wavelength=635nm, Pin_Count=2, RoHS=Unknown, Supplier=Lumex, Supplier Standard Pack=3,000, Type=Uni-Color, Viewing Angle=160
ST-Link: "Connector", Manufacturer_Name=SAMTEC, Mouser Part Number=200-FTSH10701FDVKPTR, Arrow Part Number=FTSH-107-01-F-DV-K-P-TR, Arrow Price/Stock=https://www.arrow.com/en/products/ftsh-107-01-f-dv-k-p-tr/samtec?utm_currency=USD&region=nac, Datasheet Link=http://suddendocs.samtec.com/prints/ftsh-1xx-xx-xxx-dv-xxx-xxx-mkt.pdf, Manufacturer_Part_Number=FTSH-107-01-F-DV-K-P-TR, Mouser Price/Stock=https://www.mouser.co.uk/ProductDetail/Samtec/FTSH-107-01-F-DV-K-P-TR?qs=%252BZP6%2F%252BtExtAI0atx6lcXTg%3D%3D
UART: library part CMP-1502-01080-4, "THT Vertical Pin Header WR-PHD, Pitch 2.54 mm, Single Row, 9 pins", Color=Black, Contact Resistance=20mΩ, Current Rating=3A, Operating Supply Voltage=250V, Connector Type="Male Pin", Contact Material=Copper, Contact Mating Length=5.9944mm, Contact Plating=Gold, Gender=Male, Lead Pitch=2.54mm, Mount="Through Hole", Number of Contacts=9, Number of Pins=9, Number of Positions=9, Number of Rows=1, Orientation=Vertical, Packaging=Bulk, Pitch=2.54mm, RoHS=Compliant, Termination=Solder
UVLO: "Integrated Circuit", Manufacturer_Name="Texas Instruments", Mouser Part Number=595-TLV840NADL35DBVR, Arrow Part Number=TLV840NADL35DBVR, Arrow Price/Stock=https://www.arrow.com/en/products/tlv840nadl35dbvr/texas-instruments?region=nac, Datasheet Link=https://www.ti.com/lit/gpn/TLV840, Height=1.45mm, Manufacturer_Part_Number=TLV840NADL35DBVR, Mouser Price/Stock=https://www.mouser.co.uk/ProductDetail/Texas-Instruments/TLV840NADL35DBVR?qs=DPoM0jnrROXoabpTxCy%2FVQ%3D%3D

## Free pads (board coordinates)
  round 2.2 hole 2.2 unplated mask+0: 2(3.556,38.8) 3(3.556,3.82) 4(34.26,38.8) 5(34.26,3.82) 6(77.81,38.8) 7(77.81,3.82)

## Via types
v1: diameter 0.6, hole 0.3, SIG / PWR 1 to SIG / PWR 2, 22 vias

## Nets (pads, with @x,y where several pads share a name; then routed paths per layer and width w, separated by ;. In a path a pad name is that pad's centre, name@x,y a point inside that pad or via, vN(x,y) a via of type N, cw(c..) or ccw(c..) an arc to the next point about the centre after c; other vN are vias at no path point)
3.3V: "3.3V LDO.5" "MaUWB CHIPSET.9" "MaUWB CHIPSET.10" C1.2 C2.1 C6.1 C8.2 C11.2 I2C.4 MCU.4 R1.2 R2.2 R4.2 R5.2 R6.2 R7.2 R12.2 R13.2 R21.2 ST-Link.3 UART.1 UART_MCU.4 | length 270.4
  SIG / PWR 1 w0.15: 13.888,30.734 11.688,30.734 11.688,33.902 C8.2 14.896,34.406 C11.2 15.796,38.91 17.526,40.64 27.686,40.64 27.72,40.606 R13.2 R21.2 29.85,36.322 29.956,36.428 29.956,36.439 30.226,36.708 v1(30.226,36.83) ; v1(39.06,15.35) 40.936,13.474 41.136,13.474 42.926,11.684 R12.2 41.162,10.428 39.116,8.382 39.116,2.794 40.894,1.016 71.374,1.016 73.186,2.828 R7.2 R6.2 R5.2 R4.2 73.186,11.884 74.168,12.866 74.168,20.574 72.898,21.844 72.644,21.844 ; MCU.4 50.644,21.482 50.057,22.069 49.697,22.069 C1.2 46.507,22.744 C2.1 46.003,23.023 44.388,24.638 UART_MCU.4 40.05,26.752 40.05,37.256 43.434,40.64 59.69,40.64 ; ST-Link.3 58.42,39.37 59.69,40.64 ; R2.2 65.303,21.023 65.303,20.549 67.031,18.821 67.031,18.093 R1.2 67.09,17.238 69.088,15.24 72.39,15.24 72.898,15.748 72.898,18.034 72.224,18.708 70.409,18.708 69.762,19.355 69.762,20.269 70.575,21.082 71.882,21.082 72.644,21.844 ; I2C.4 I2C.4@71.12,24.892 ; C6.1 70.555,39.279 69.564,38.288 69.019,38.288 69.019,39.439 67.818,40.64 ; 59.69,40.64 67.818,40.64 ; 67.818,40.64 79.45,40.64 80.056,40.034 80.056,26.716 79.502,26.162 72.39,26.162 I2C.4@71.12,24.892 ; I2C.4@71.12,24.892 72.136,24.892 72.644,24.384 72.644,21.844
  SIG / PWR 2 w0.15: v1(30.226,36.83) 34.29,36.83 36.322,34.798 36.322,18.034 35.798,17.51 ; UART.1 35.485,12.371 35.485,17.197 35.798,17.51 ; v1(39.06,15.35) 39.03,15.38 39.03,16.97 38.49,17.51 35.798,17.51
ADR1: ADR.1 MCU.16 R4.1 | length 16.1
  SIG / PWR 1 w0.15: MCU.16 58.68,16.406 59.846,15.24 66.04,15.24 66.802,14.478 ADR.1 70.542,12.428 71.086,11.884 R4.1
ADR2: ADR.2 MCU.15 R5.1 | length 17.8
  SIG / PWR 1 w0.15: MCU.15 58.051,16.673 58.051,15.97 59.185,14.836 63.299,14.836 64.262,13.873 ADR.2 64.262,11.773 64.752,11.283 65.697,11.283 67.328,9.652 R5.1
ADR3: ADR.3 MCU.14 R6.1 | length 19
  SIG / PWR 1 w0.15: MCU.14 57.251,16.673 57.251,15.97 58.789,14.432 60.373,14.432 61.722,13.083 ADR.3 61.722,11.773 62.212,11.283 63.157,11.283 66.82,7.62 R6.1
ADR4: ADR.4 MCU.13 R7.1 | length 20.8
  SIG / PWR 1 w0.15: MCU.13 56.28,15.881 58.589,13.573 58.692,13.573 59.182,13.083 ADR.4 59.182,11.773 59.672,11.283 60.617,11.283 66.312,5.588 R7.1
BAT+: BAT.2 Q2.3 | length 6.4
  SIG / PWR 1 w0.15: Q2.3 73.93,28.99 75.674,30.734 BAT.2
GND: "3.3V LDO.2" "MaUWB CHIPSET.8" "MaUWB CHIPSET.15" "MaUWB CHIPSET.16" ADR.5 ADR.6 ADR.7 ADR.8 BAT.1 C1.1 C2.2 C3.2 C4.2 C5.2 C6.2 C8.1 C11.1 I2C.3 MCU.5 NRST.4 PWR.2 Q1.2 R14.1 R15.1 R19.1 RUN.2 RX.2 ST-Link.5 ST-Link.7 ST-Link.11 STATUS_1.2 STATUS_2.2 TX.2 UART.2 UART_MCU.3 UVLO.3 | length 86.2
  SIG / PWR 1 w0.15: v1(11.53,0.78) 11.53,0.902 11.698,1.07 RUN.2 ; v1(16.764,4.064) 17.25,3.578 TX.2@17.25,2.54 ; C11.1 21.844,35.354 22.4,34.798 26.416,34.798 27.088,34.126 27.088,30.734 24.888,30.734 ; v1(22.352,2.032) 22.86,2.54 RX.2 ; 27.088,9.734 27.088,9.184 27.563,8.709 28.629,8.709 v1(28.702,8.636) ; PWR.2@42.926,2.264 49,2.264 ; v1(44.1,27.11) 44.222,27.11 45.037,26.295 NRST.4 ; v1(46.228,19.558) 47.611,19.558 C1.1@48.997,20.944 ; C2.2 46.457,20.944 C1.1@48.997,20.944 ; Q1.2 49.154,14.92 49.836,14.238 R14.1 ; v1(50.292,3.556) 49,2.264 ; MCU.5 51.471,20.853 50.396,20.853 50.305,20.944 C1.1 C1.1@48.997,20.944 ; STATUS_2.2 52.89,2.264 49,2.264 ; ST-Link.11 53.34,38.862 53.848,39.37 v1(54.61,39.37) 55.372,39.37 55.88,38.862 ST-Link.7 ST-Link.5 ; ADR.5 ADR.6 ADR.7 ADR.8 69.324,3.828 v1(70.358,2.794) ; v1(61.976,32.512) 62.738,31.75 C3.2 ; UVLO.3 66.588,30.186 v1(67.056,29.718) 67.056,27.774 67.11,27.72 R19.1 ; 66.617,37.338 72.045,37.338 C6.2 72.136,36.576 v1(71.628,36.068) ; C5.2 74.513,32.603 v1(74.93,33.02) 76.109,34.199 C4.2 ; R15.1 75.604,39.658 75.824,39.878 v1(75.946,39.878)
  other v1: 25.654,34.798
I2C1_SCL: I2C.2 MCU.19 R1.1 | length 22.6
  SIG / PWR 1 w0.15: MCU.19 63.342,19.882 64.99,18.234 R1.1 64.99,17.834 65.365,17.459 66.1,17.459 68.827,14.732 72.898,14.732 73.66,15.494 73.66,18.542 72.39,19.812 I2C.2
I2C1_SDA: I2C.1 MCU.21 R2.1 | length 14.4
  SIG / PWR 1 w0.15: MCU.21 62.469,21.482 63.847,22.86 66.548,22.86 67.09,22.318 R2.1 67.09,21.136 70.166,18.06 70.166,17.972 I2C.1
MaUWB_RST: MCU.12 R3.2 | length 5
  SIG / PWR 1 w0.15: R3.2 54.136,14.538 54.651,15.053 55.48,15.881 MCU.12
MaUWB_SWCLK: "MaUWB CHIPSET.13" UART.9 | length 17.3
  SIG / PWR 1 w0.15: 20.488,30.734 20.488,31.284 21.263,32.059 23.331,32.059 23.377,32.013 23.811,31.579 23.811,29.843 24.698,28.956 28.448,28.956 30.48,30.988 UART.9
MaUWB_SWDIO: "MaUWB CHIPSET.14" UART.8 | length 13.1
  SIG / PWR 1 w0.15: 22.688,30.734 22.688,28.874 23.114,28.448 UART.8
NC_1: UVLO.4
NC_2: UVLO.5
NetC7_1: C7.1 NRST.3 | length 3.7
  SIG / PWR 1 w0.15: C7.1 42.495,30.65 43.39,31.545 NRST.3
NetPWR_1: PWR.1 R12.1 | length 3
  SIG / PWR 1 w0.15: PWR.1@42.926,5.864 R12.1
NetQ1_1: Q1.1 R3.1 R14.2 | length 4.3
  SIG / PWR 1 w0.15: Q1.1 49.704,13.02 R14.2 51.796,12.686 R3.1
NetQ2_1: Q2.1 R15.2 | length 15.4
  SIG / PWR 1 w0.15: Q2.1 74.94,28.04 76.094,29.194 76.836,29.194 78.21,30.568 78.21,35.38 76.032,37.558 R15.2
NetR8_1: R8.1 R9.2 R19.2 | length 4
  SIG / PWR 1 w0.2: R9.2 64.022,25.654 65.244,25.654 R8.1 R19.2
NetR10_1: R10.1 STATUS_1.1 | length 3.4
  SIG / PWR 1 w0.15: R10.1 46.736,6.576 47.448,5.864 STATUS_1.1@47.498,5.864
NetR11_1: R11.1 STATUS_2.1 | length 3
  SIG / PWR 1 w0.15: STATUS_2.1 R11.1
NetR16_1: R16.1 RUN.1 | length 3.7
  SIG / PWR 1 w0.15: R16.1 14.268,5.354 14.5,5.122 14.5,2.762 RUN.1
NetR17_1: R17.1 TX.1 | length 3.7
  SIG / PWR 1 w0.15: R17.1 20.828,5.334 21.082,5.08 21.082,2.772 TX.1@20.85,2.54
NetR18_1: R18.1 RX.1 | length 3.7
  SIG / PWR 1 w0.15: R18.1 26.416,5.334 26.75,5 RX.1
NRST: C7.2 MCU.6 NRST.1 ST-Link.12 | length 27.4
  SIG / PWR 1 w0.15: C7.2 46.62,28.85 49.04,31.27 NRST.1 49.04,30.602 49.698,29.944 49.698,29.792 v1(50.82,28.67) ; MCU.6 51.867,20.107 52.423,20.107 53.294,20.978 53.294,21.93 53.594,22.23 v1(53.594,22.352) ; v1(52.832,28.194) 53.34,28.702 ST-Link.12
  SIG / PWR 2 w0.15: v1(50.82,28.67) 51.296,28.194 v1(52.832,28.194) 52.832,23.114 v1(53.594,22.352)
RESET: "3.3V LDO.3" R20.1 UVLO.1 | length 7
  SIG / PWR 1 w0.2: R20.1 63.42,36.388 66.617,36.388 66.617,32.917 UVLO.1
RUN_LED: "MaUWB CHIPSET.1" R16.2 | length 4.5
  SIG / PWR 1 w0.15: 11.688,9.734 11.688,5.634 R16.2
"RX LED": "MaUWB CHIPSET.5" R18.2 | length 6.5
  SIG / PWR 1 w0.15: 20.488,9.734 20.488,7.96 23.114,5.334 R18.2
SCL: "MaUWB CHIPSET.12" R21.1 UART.7 | length 31.9
  SIG / PWR 1 w0.15: R21.1 25.507,36.435 25.033,36.435 23.622,37.846 21.518,37.846 19.558,35.886 19.558,32.004 18.288,30.734 18.288,28.702 21.082,25.908 UART.7
SDA: "MaUWB CHIPSET.11" R13.1 UART.6 | length 37.6
  SIG / PWR 1 w0.15: R13.1 20.509,38.608 17.818,35.917 17.818,33.014 16.088,31.284 16.088,30.734 16.088,27.264 16.064,27.24 19.936,23.368 UART.6
STAT_LEDG: MCU.9 R10.2 | length 12.9
  SIG / PWR 1 w0.15: R10.2 46.75,10.414 v1(48.768,10.414) ; v1(49.53,16.51) 52.976,16.51 53.08,16.406 MCU.9
  SIG / PWR 2 w0.15: v1(48.768,10.414) 50.038,11.684 50.038,16.002 v1(49.53,16.51)
STAT_LEDR: MCU.10 R11.2 | length 7.5
  SIG / PWR 1 w0.15: R11.2 53.086,14.846 53.88,15.64 MCU.10
SWCLK: MCU.25 ST-Link.6 | length 7.3
  SIG / PWR 1 w0.15: ST-Link.6 57.15,28.984 58.455,27.679 58.455,25.545 MCU.25
SWDIO: MCU.24 ST-Link.4 | length 8.8
  SIG / PWR 1 w0.15: ST-Link.4 58.42,30.976 60.118,29.278 MCU.24
"TX LED": "MaUWB CHIPSET.4" R17.2 | length 4.5
  SIG / PWR 1 w0.15: 18.288,9.734 18.288,5.574 R17.2
UART2_RX: "MaUWB CHIPSET.3" Q1.3 UART.5 | length 74.6
  SIG / PWR 1 w0.15: UART.5 26.632,20.828 16.088,10.284 16.088,1.732 17.058,0.762 27.94,0.762 36.83,9.652 36.83,17 37.356,17.526 39.684,17.526 40.132,17.078 40.132,15.494 40.64,14.986 44.974,14.986 Q1.3
USART1_RX: "MaUWB CHIPSET.6" MCU.31 ST-Link.13 UART.4 UART_MCU.1 | length 65.5
  SIG / PWR 1 w0.15: 22.688,9.734 22.688,8.3 23.622,7.366 30.226,7.366 31.496,8.636 31.496,12.372 33.602,14.478 35.052,14.478 35.814,15.24 35.814,16.256 UART.4 34.484,18.99 40.192,18.99 UART_MCU.1 47.34,17.018 47.357,17.035 51.833,17.035 55.118,20.32 55.118,23.114 53.88,24.352 MCU.31 53.935,25.375 53.935,33.695 53.594,34.036 53.08,34.036 52.07,35.046 ST-Link.13
USART1_TX: "MaUWB CHIPSET.7" MCU.7 ST-Link.14 UART.3 UART_MCU.2 | length 51.6
  SIG / PWR 1 w0.15: 24.888,9.734 24.888,10.284 25.363,10.759 26.145,10.759 31.134,15.748 UART.3 32.757,16.773 32.757,18.713 33.579,19.534 34.749,19.534 35.674,20.46 41.122,20.46 41.77,19.812 41.91,19.812 UART_MCU.2 43.18,18.542 50.399,18.542 50.768,18.911 51.471,18.911 MCU.7 53.118,19.082 54.356,20.32 54.356,22.688 52.07,24.974 ST-Link.14
VBAT: "3.3V LDO.1" C4.1 C5.1 Q2.2 R8.2 R20.2 UVLO.2 | length 32.3
  SIG / PWR 1 w0.15: 70.01,32.41 72.155,30.265 72.985,30.265 Q2.2
  SIG / PWR 1 w0.2: R8.2 65.278,28.702 64.328,29.652 64.328,31.938 ; 66.617,38.288 63.42,38.288 R20.2 63.044,38.114 61.976,37.046 61.976,34.29 64.328,31.938 ; C4.1@74.259,35.277 C4.1 74.259,34.828 73.884,34.453 C5.1 71.029,34.453 70.537,33.961 70.537,32.937 70.01,32.41 69.539,31.938 UVLO.2 64.328,31.938
VBAT_ADC: C3.1 MCU.22 R9.1 | length 8.6
  SIG / PWR 1 w0.15: MCU.22 61.144,22.282 61.962,23.1 61.962,26.364 62.738,27.14 C3.1
pads on no net: "3.3V LDO.4" "MaUWB CHIPSET.2" MCU.1 MCU.2 MCU.3 MCU.8 MCU.11 MCU.17 MCU.18 MCU.20 MCU.23 MCU.26 MCU.27 MCU.28 MCU.29 MCU.30 MCU.32 NRST.2 ST-Link.1 ST-Link.2 ST-Link.8 ST-Link.9 ST-Link.10

## Polygon pours and split planes (outlines as drawn)
GND on GND (Mid2) "GND_L03_P001" (solid, pour order 1): 4.064,0 76.2,0 ccw(c76.2,4.572) 80.772,4.572 80.772,40.131 ccw(c78.993,40.131) 78.996,41.91 2.67,42.037 ccw(c2.665,39.372) 0,39.372 0,4.064 ccw(c4.064,4.064)
GND on GND "GND_L02_P000" (solid, pour order 0): 4.064,0 76.2,0 ccw(c76.2,4.572) 80.772,4.572 80.772,39.624 ccw(c78.486,39.624) 78.486,41.91 2.54,41.91 ccw(c2.54,39.37) 0,39.37 0,4.064 ccw(c4.064,4.064)
GND on SIG / PWR 1 "GND_L01_P002" (solid, pour order 2): 4.064,0 76.2,0 ccw(c76.2,4.572) 80.772,4.572 80.772,40.132 ccw(c78.994,40.132) 78.994,41.91 2.794,41.91 ccw(c2.794,39.116) 0,39.116 0,4.064 ccw(c4.064,4.064)

## Keep-outs
Keep-Out Layer:
  rectangle: 0,-0.01 10.668,41.91
  lines w0.254: 0,36.08 0,37.592 ; 3.798,0 77.724,0 80.772,3.048 80.772,40.386 79.248,41.91 2.032,41.91 0.007,39.885 0.007,2.533 1.085,1.455 2.54,0 4.064,0

## Silkscreen, mask and mechanical layers (free items; w line width, h text height)
Top Overlay:
  drawing of 15 lines, arcs and shapes, not listed
  text "SWCLK" at 36.314,29.972 h0.75 r90
  text "BAT+" at 79.502,29.972 h1 r90
  text "SWDIO" at 36.314,27.178 h0.75 r90
  text "BAT-" at 79.502,26.924 h1 r90
  text "SCL" at 36.314,25.146 h0.75 r90
  text "3.3v" at 40.121,23.876 h1 r90
  text "3.3v" at 73.649,23.876 h1 r90
  text "SDA" at 36.314,22.606 h0.75 r90
  text "GND" at 40.121,21.336 h1 r90
  text "GND" at 73.649,21.336 h1 r90
  text "RST" at 36.314,20.066 h0.75 r90
  text "TX" at 40.132,18.796 h1 r90
  text "SCL" at 73.649,18.796 h1 r90
  text "RX" at 36.322,17.78 h0.75 r90
  text "RX" at 40.132,16.256 h1 r90
  text "SDA" at 73.649,16.256 h1 r90
  text "TX" at 36.322,15.24 h0.75 r90
  text "GND" at 36.314,12.446 h0.75 r90
  text "MaUWB Board V1" at 79.481,10.414 h2 r90
  text "3.3V" at 36.314,9.906 h0.75 r90
Mechanical 1:
  lines w0.254: 37.82,36.8 37.846,41.91 ; 37.84,0.02 37.84,4.56 ; 37.846,5.63 37.846,16.15 37.846,13.081 ; 37.846,35.31 37.848,28.697 37.848,21.782
Top Assembly:
  lines w0.254: 37.846,11.43 37.846,12.446